# Altium PCB PCB_Emergencia_NoRute.PcbDoc
Units mil, origin at the board's own origin, x right, y up, seen from the top; angles counter-clockwise.
Board outline 2520 x 2760 mil, 2 copper layers (Top Layer, Bottom Layer); 72 components, 52 nets, 238 pads, 0 vias.
Unrouted connection lines stored in the file: 88.
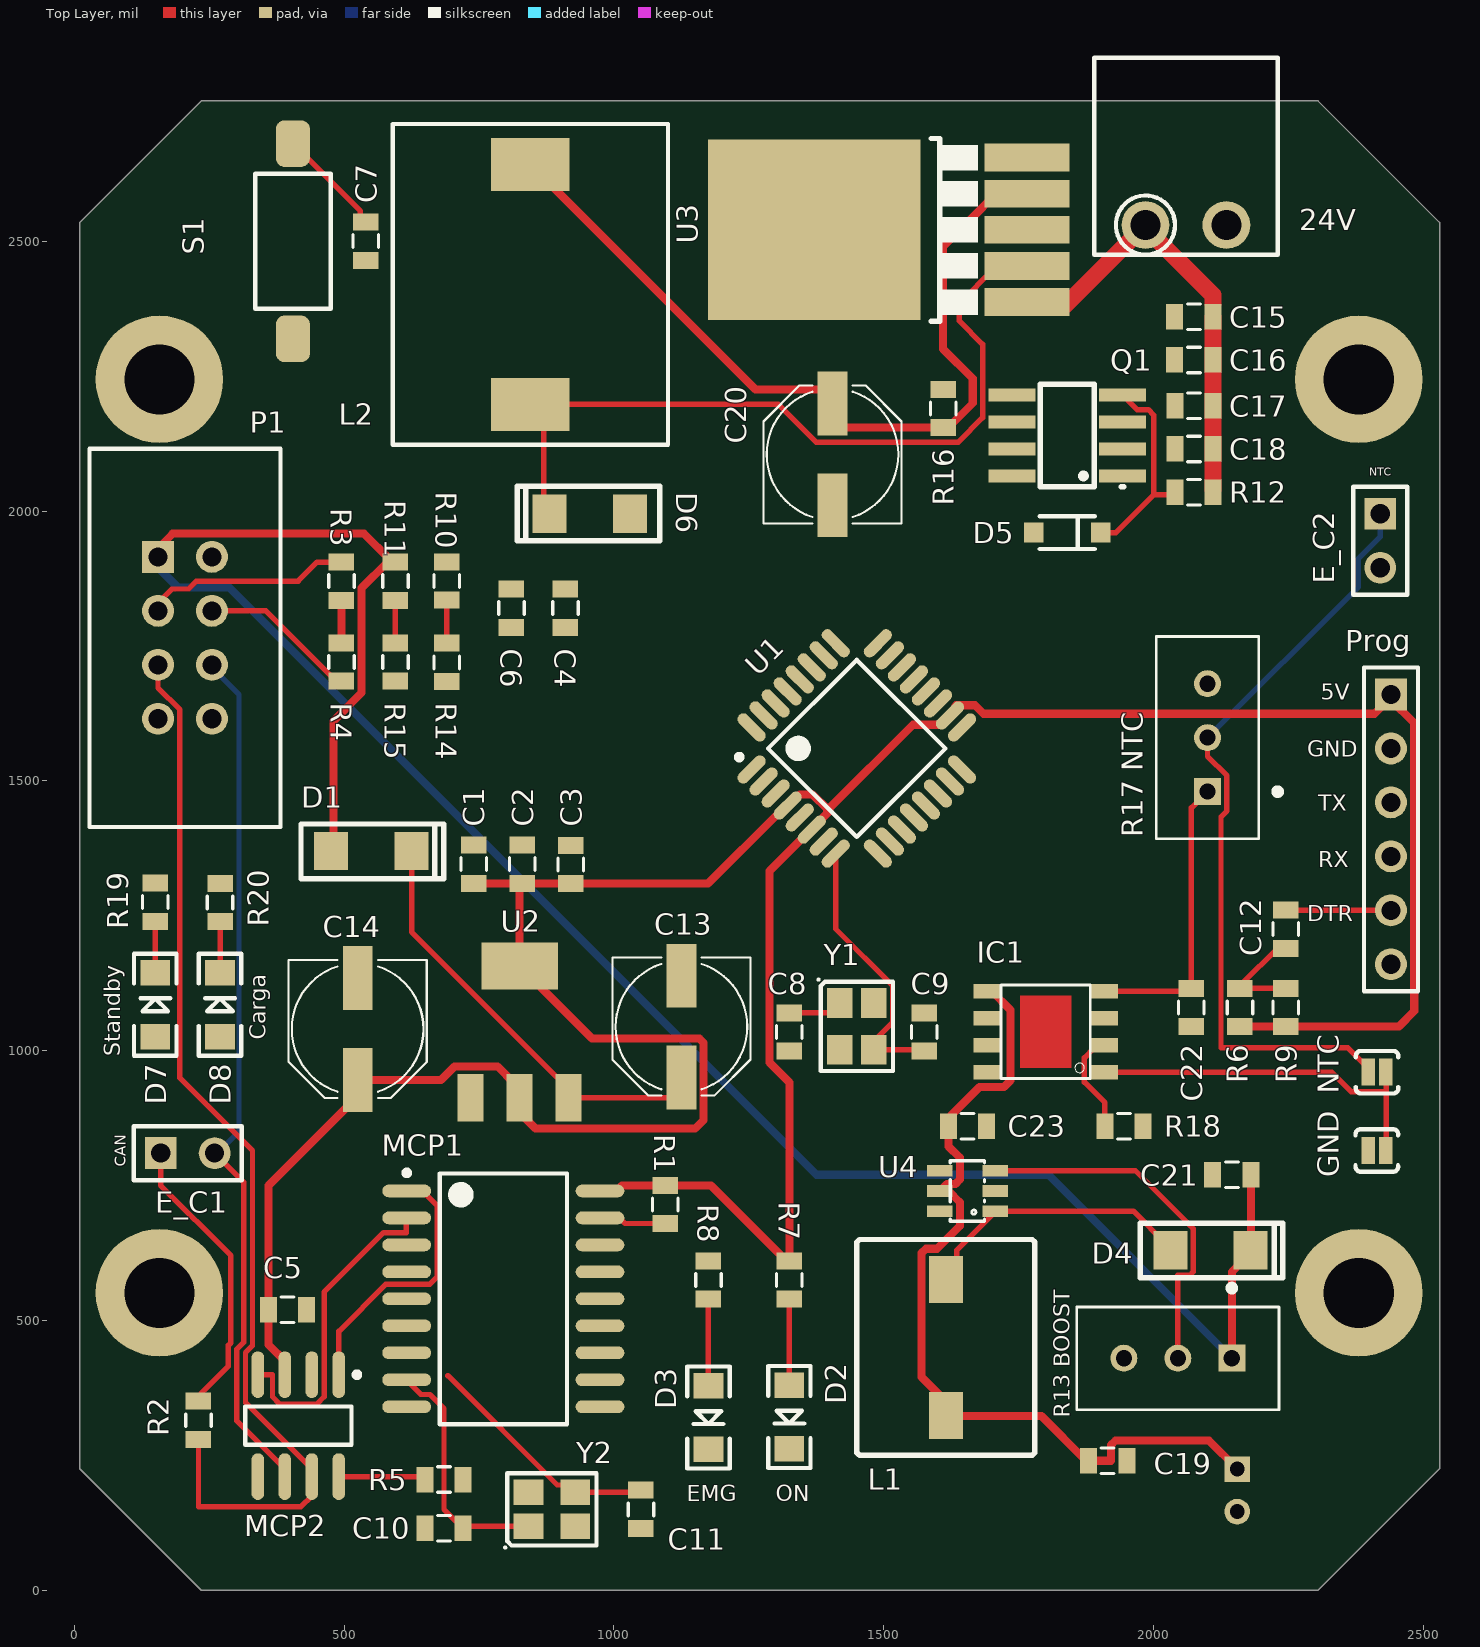
[diagram p0: Top Layer view]
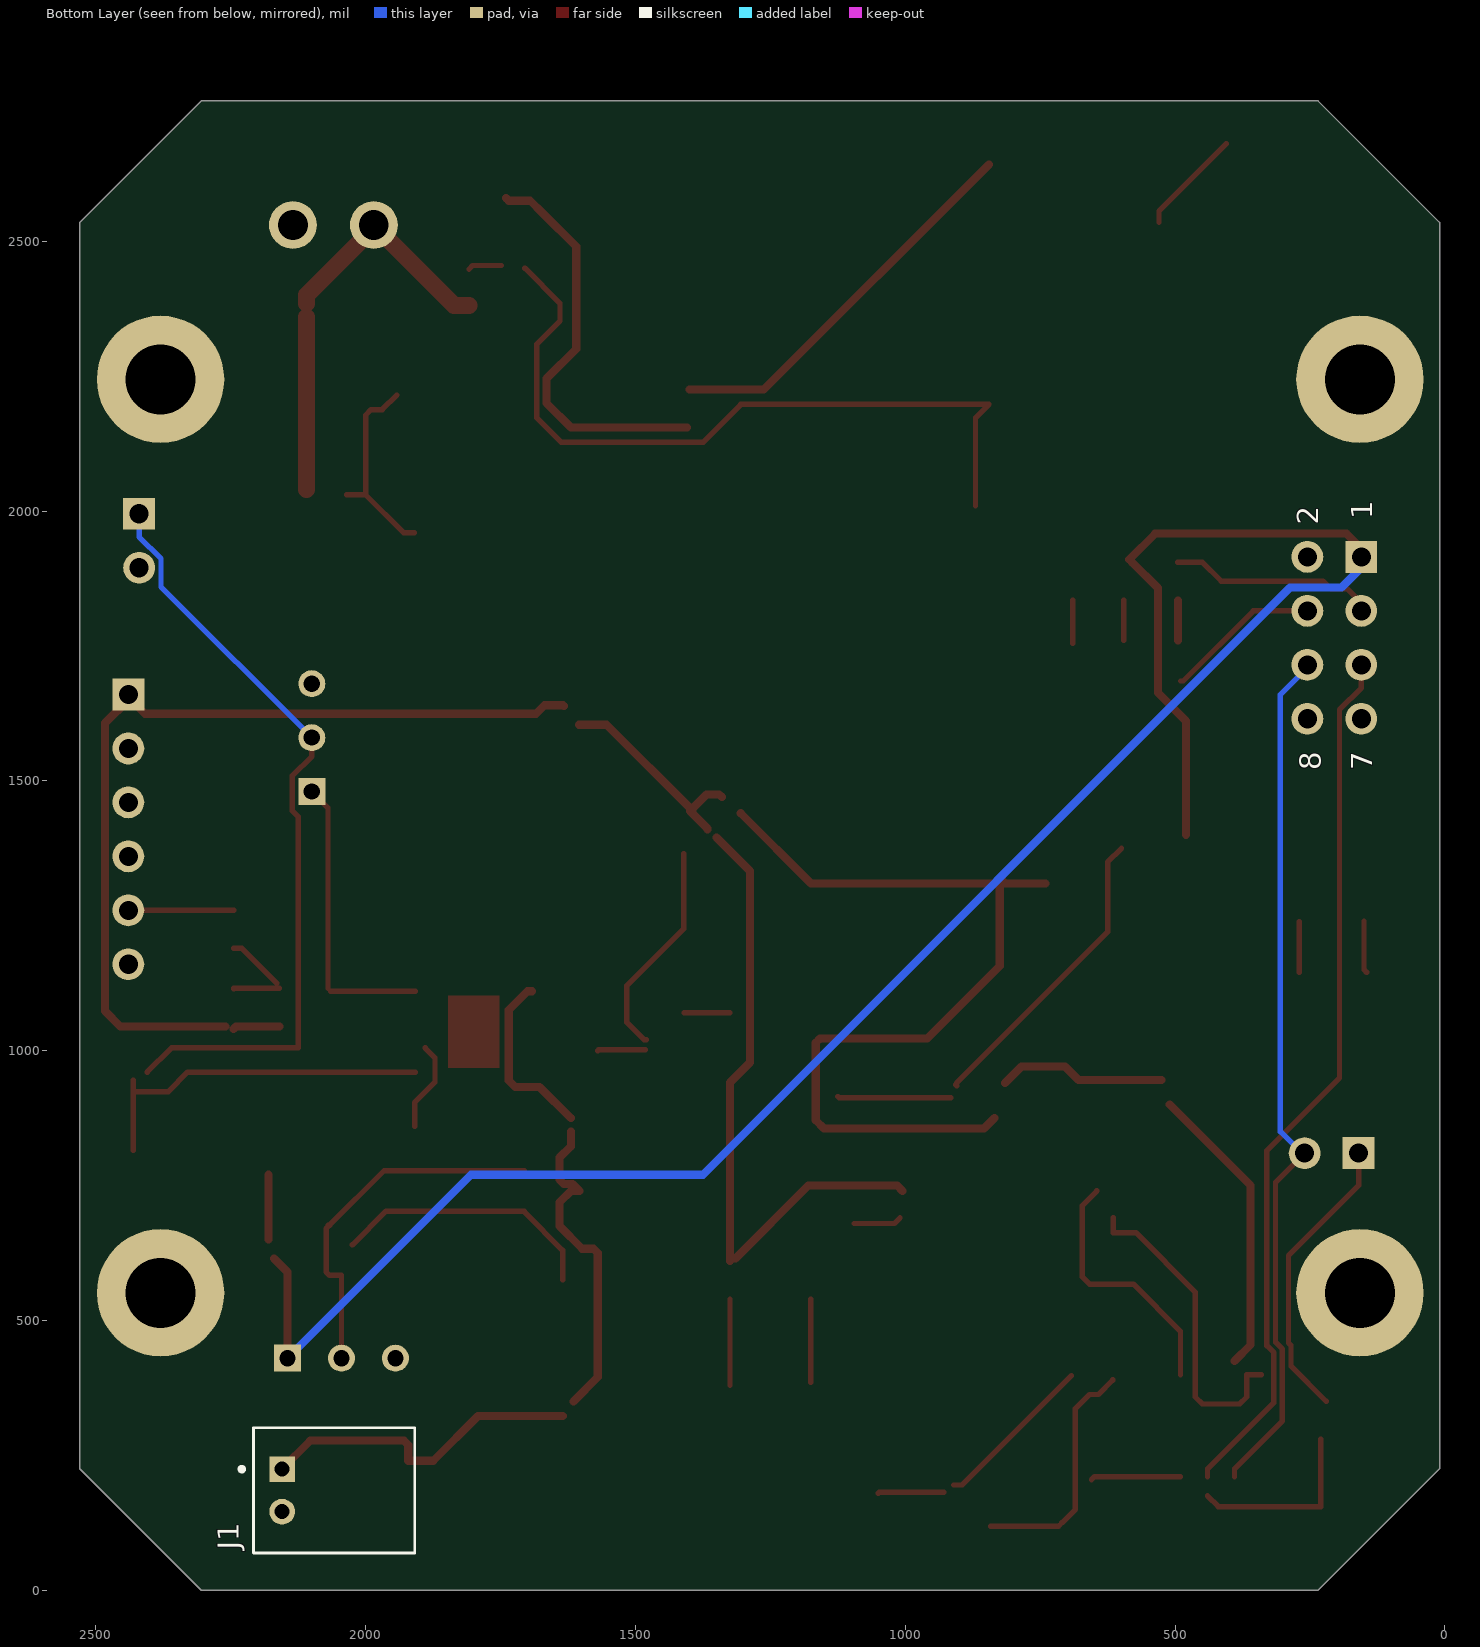
[diagram p1: Bottom Layer view, seen from below]

## Layer stack, top to bottom
Top Solder: solder mask 0.4, Solder Resist, Dk 3.5
Top Layer: signal copper 1.4
Dielectric 1: dielectric 12.6, FR-4, Dk 4.8
Bottom Layer: signal copper 1.4
Bottom Solder: solder mask 0.4, Solder Resist, Dk 3.5

## Board outline
10,225 235,0 2305,0 2530,225 2530,2535 2305,2760 235,2760 10,2535

## Design rules (kind name [scope] priority, off if disabled: settings)
BoardOutlineClearance [All] p1: gap=39.37 ignorepadtopadclearanceinfootprint=FALSE
Clearance Clearance_2 [InNamedPolygon('GND TOP PLANE')] p1: gap=10 ignorepadtopadclearanceinfootprint=FALSE except(0: Arc-Hole Track-Hole SMDPad-Hole THPad-Hole Via-Hole Fill-Hole Poly-Hole Region-Hole Text-Hole)
Clearance Clearance_1 [InNamedPolygon('GND BOTTOM PLANE')] p2: gap=10 ignorepadtopadclearanceinfootprint=FALSE except(0: Arc-Hole Track-Hole SMDPad-Hole THPad-Hole Via-Hole Fill-Hole Poly-Hole Region-Hole Text-Hole)
Clearance Clearance_POWER [InNet('24V') vs InNet('GND')] p3: gap=15 ignorepadtopadclearanceinfootprint=FALSE
Clearance [All] p4: gap=5.98 ignorepadtopadclearanceinfootprint=FALSE
HoleSize [All] p1: absolutevalues=TRUE maxlimit=248.03 minlimit=11.81 maxpercent=80.000 minpercent=20.000
PlaneClearance [All] p1: clearance=197.48
PlaneConnect [All] p1: planeconnectstyle=Relief reliefexpansion=20 reliefentries=4 reliefconductorwidth=15 reliefairgap=-1.97
PolygonConnect [All] p1: connectstyle=Relief reliefconductorwidth=10 reliefentries=4 polygonreliefangle="90 Angle" airgapwidth=-1.97
RoutingVias RoutingVias_24V [InNet('24V')] p1: holewidth=19.68 width=31.5 viastyle="Through Hole" minholewidth=11.81 minwidth=23.62 maxholewidth=39.37 maxwidth=47.24
RoutingVias RoutingVias_GNDC [InNet('GNDC')] p2: holewidth=19.68 width=31.5 viastyle="Through Hole" minholewidth=11.81 minwidth=23.62 maxholewidth=39.37 maxwidth=47.24
RoutingVias [All] p3: holewidth=11.81 width=23.62 viastyle="Through Hole" minholewidth=11.81 minwidth=23.62 maxholewidth=39.37 maxwidth=47.24
SMDNeckDown [All] p1: percent=120.000
SolderMaskExpansion [All] p1: expansion=4
Width Width_24V [InNet('24V')] p1: maxlimit=35 minlimit=27.56 preferedwidth=31.5
Width Width_GNDC [InNet('GNDC')] p2: maxlimit=35 minlimit=23.62 preferedwidth=31.5
Width Width_GND [InNet('GND')] p3: maxlimit=20 minlimit=10 preferedwidth=15 checkconnectedcopper=TRUE
Width Width_9V [InNet('9V')] p4: maxlimit=20 minlimit=10 preferedwidth=15 checkconnectedcopper=TRUE
Width Width_5V [InNet('5V')] p5: maxlimit=15 minlimit=10 preferedwidth=15 checkconnectedcopper=TRUE
Width Width_3.7V [InNet('BAT')] p6: maxlimit=15 minlimit=10 preferedwidth=15 checkconnectedcopper=TRUE
Width Width_5VBuck [InNet('5VBUCK')] p7: maxlimit=15 minlimit=10 preferedwidth=15 checkconnectedcopper=TRUE
Width [All] p8: maxlimit=20 minlimit=10 preferedwidth=10
27 further rules are at their usual default settings.

## Components (designator, comment, footprint, x,y, rotation, side; value= is the part's Value field where it differs from the comment)
24V "20020110-D021A01LF" "FCI 06-381-2PIN" 2060,2660 r0 top (schematic designator 1)
C1 "CapacitorStandard 0603 ceramic capacitor, and 0.1\" leaded capacitor." 0805 740,1345.43 r270 top
C2 "CapacitorStandard 0603 ceramic capacitor, and 0.1\" leaded capacitor." 0805 830,1345.43 r270 top
C3 "CapacitorStandard 0603 ceramic capacitor, and 0.1\" leaded capacitor." 0805 920,1345 r270 top
C4 "CapacitorStandard 0603 ceramic capacitor, and 0.1\" leaded capacitor." 0805 910,1820 r270 top
C5 "CapacitorStandard 0603 ceramic capacitor, and 0.1\" leaded capacitor." 0805 395,520 r180 top
C6 "CapacitorStandard 0603 ceramic capacitor, and 0.1\" leaded capacitor." 0805 810,1820 r270 top
C7 "CapacitorStandard 0603 ceramic capacitor, and 0.1\" leaded capacitor." 0805 540,2500 r90 top
C8 "CapacitorStandard 0603 ceramic capacitor, and 0.1\" leaded capacitor." 0805 1325,1034.57 r90 top
C9 "CapacitorStandard 0603 ceramic capacitor, and 0.1\" leaded capacitor." 0805 1575,1034.57 r90 top
C10 "CapacitorStandard 0603 ceramic capacitor, and 0.1\" leaded capacitor." 0805 685,115 r0 top
C11 "CapacitorStandard 0603 ceramic capacitor, and 0.1\" leaded capacitor." 0805 1050,150 r270 top
C12 "CapacitorStandard 0603 ceramic capacitor, and 0.1\" leaded capacitor." 0805 2245,1225 r270 top
C13 "47u" PANASONIC_D 1125,1044.49 r270 top
C14 "47u" PANASONIC_D 525,1040 r270 top
C15 "CapacitorStandard 0603 ceramic capacitor, and 0.1\" leaded capacitor." 0805 2074.57,2360 r0 top
C16 "CapacitorStandard 0603 ceramic capacitor, and 0.1\" leaded capacitor." 0805 2074.57,2280 r0 top
C17 "CapacitorStandard 0603 ceramic capacitor, and 0.1\" leaded capacitor." 0805 2075,2195 r0 top
C18 "CapacitorStandard 0603 ceramic capacitor, and 0.1\" leaded capacitor." 0805 2075,2115 r0 top
C19 "CapacitorStandard 0603 ceramic capacitor, and 0.1\" leaded capacitor." 0805 1915,240 r0 top
C20 "4.7u" PANASONIC_D 1405,2105 r90 top
C21 "CapacitorStandard 0603 ceramic capacitor, and 0.1\" leaded capacitor." 0805 2145,770 r180 top
C22 "CapacitorStandard 0603 ceramic capacitor, and 0.1\" leaded capacitor." 0805 2070,1080 r270 top
C23 "CapacitorStandard 0603 ceramic capacitor, and 0.1\" leaded capacitor." 0805 1655,860 r0 top
D1 "SS26FL" SS26FL 550,1370 r180 top
D2 "LED Encendido" LED-1206 1325,320.94 r270 top
D3 "LED Parada" LED-1206 1175,320 r270 top
D4 "SS26FL" SS26FL 2105.5,630 r180 top
D5 "13V Zener MM1Z13" SOD-123 1840,1960 r180 top
D6 "SS26FL" SS26FL 955,1995 r0 top
D7 "LED Standby" LED-1206 150,1085 r90 top
D8 "LED Carga" LED-1206 270,1085 r90 top
E_C1 "Header 2" HDR1X2 160,810 r0 top
E_C2 "Header 2" HDR1X2 2420,1995 r270 top
GND "JUMPER-PAD-2-NC_BY_PASTE" PAD-JUMPER-2-NC_BY_PASTE_YES_SILK 2413.75,815 r0 top (schematic designator JP2)
IC1 "TP4056" *SOP-8 1800,1035 r180 top
J1 "Conector JST" *JST_S2B-PH-K-S(LF)(SN) 2155,185 r90 bottom
L1 "CDRH74" CDRH74 1615,450 r90 top value=22uH
L2 "SMMS1360" "SMMS1360 - duplicate" 845,2420 r90 top value=68uH
MCP1 "MCP2515T-I/SO" SOIC-SO18_N 795,540 r0 top
MCP2 "MCP2551T-I/SN" SOIC-SN8_N 415,305 r270 top
NTC "JUMPER-PAD-2-NC_BY_PASTE" PAD-JUMPER-2-NC_BY_PASTE_YES_SILK 2414.22,960 r180 top (schematic designator JP1)
P1 "IDC2X4" IDC2X4 205,1765 r270 top
Prog "Header 6" HDR1X6 2440,1660 r270 top (schematic designator Prog1)
Q1 "IRF7832TRPBF" SO-08 1840,2140 r90 top
R1 "ResistorBasic schematic elements and footprints for 0603, 1206, and PTH resistors." 0805 1095,715 r270 top
R2 "ResistorBasic schematic elements and footprints for 0603, 1206, and PTH resistors." 0805 230,315 r90 top
R3 "ResistorBasic schematic elements and footprints for 0603, 1206, and PTH resistors." 0805 495,1870 r270 top
R4 "ResistorBasic schematic elements and footprints for 0603, 1206, and PTH resistors." 0805 495,1720 r90 top
R5 "ResistorBasic schematic elements and footprints for 0603, 1206, and PTH resistors." 0805 685,205 r180 top
R6 "ResistorBasic schematic elements and footprints for 0603, 1206, and PTH resistors." 0805 2160,1080 r270 top
R7 "ResistorBasic schematic elements and footprints for 0603, 1206, and PTH resistors." 0805 1325,575 r90 top
R8 "ResistorBasic schematic elements and footprints for 0603, 1206, and PTH resistors." 0805 1175,575 r90 top
R9 "ResistorBasic schematic elements and footprints for 0603, 1206, and PTH resistors." 0805 2245,1080 r90 top
R10 "ResistorBasic schematic elements and footprints for 0603, 1206, and PTH resistors." 0805 690,1870.43 r90 top
R11 "ResistorBasic schematic elements and footprints for 0603, 1206, and PTH resistors." 0805 595,1870 r90 top
R12 "20K" 0805 2075,2035 r0 top
"R13 BOOST" "3296W" 3296W 2045,430 r270 top value=20k (schematic designator R13)
R14 "ResistorBasic schematic elements and footprints for 0603, 1206, and PTH resistors." 0805 690,1719.57 r90 top
R15 "ResistorBasic schematic elements and footprints for 0603, 1206, and PTH resistors." 0805 595,1720 r90 top
R16 "ResistorBasic schematic elements and footprints for 0603, 1206, and PTH resistors." 0805 1610,2190 r270 top
"R17 NTC" "3296W" 3296W 2100,1580 r180 top value=20k (schematic designator R17)
R18 "ResistorBasic schematic elements and footprints for 0603, 1206, and PTH resistors." 0805 1945,860 r180 top
R19 "ResistorBasic schematic elements and footprints for 0603, 1206, and PTH resistors." 0805 150,1275 r270 top
R20 "ResistorBasic schematic elements and footprints for 0603, 1206, and PTH resistors." 0805 270,1274.57 r270 top
S1 "FSMSMTR" "TE FSMSMTR" 405,2500 r0 top
U1 "ATmega328-AU" 32A_N 1450,1560 r45 top
U2 "NCP1117" SOT223 825,1035 r0 top
U3 "LM2596S" LM2596S 1371.3,2521.14 r90 top
U4 "MT3608" *SOT23-6 1655,740 r90 top
Y1 "16MHz" "NDK NX3225SA" 1450,1045 r270 top
Y2 "16MHz" "NDK NX3225SA" 885,150 r0 top

## Footprints (in the part's own frame and the unit in brackets; to place one, negate y for a bottom-side part, rotate by r counter-clockwise, add the part's x,y. Pads: shape width x height; smd on the part's side, far side on the other; paste and mask are expansions set on the pad)
32A_N [mm] "Thin QFP, 32-Leads, Body 7x7mm, Pitch 0.8mm, IPC Medium Density"
  oval 1.65x0.55 smd: 1(-4.2,2.8) 2(-4.2,2) 3(-4.2,1.2) 4(-4.2,0.4) 5(-4.2,-0.4) 6(-4.2,-1.2) 7(-4.2,-2) 8(-4.2,-2.8) 17(4.2,-2.8) 18(4.2,-2) 19(4.2,-1.2) 20(4.2,-0.4) 21(4.2,0.4) 22(4.2,1.2) 23(4.2,2) 24(4.2,2.8)
  oval 0.55x1.65 smd: 9(-2.8,-4.2) 10(-2,-4.2) 11(-1.2,-4.2) 12(-0.4,-4.2) 13(0.4,-4.2) 14(1.2,-4.2) 15(2,-4.2) 16(2.8,-4.2) 25(2.8,4.2) 26(2,4.2) 27(1.2,4.2) 28(0.4,4.2) 29(-0.4,4.2) 30(-1.2,4.2) 31(-2,4.2) 32(-2.8,4.2)
  silkscreen extent -4.32,-2.95 2.95,3.75, body extent -4.52,-4.53 4.5,4.5, height 1.15
0805 [mil]
  rect 31.5x47.24 smd: 1(-35.43,0) 2(35.43,0)
  silkscreen extent -12,-24 12,24, body extent -39,-25 39,25, height 20
3296W [mm]
  rect 1.268x1.268 hole 0.76: 1(0,2.54)
  round 1.268 hole 0.76: 2(0,0) 3(0,-2.54)
  silkscreen extent -3.4,-4.76 2.42,4.76, body extent -2.41,-4.76 2.42,4.77, height 11.55
*JST_S2B-PH-K-S(LF)(SN) [mm]
  rect 1.208x1.208 hole 0.7: 1(1,0)
  round 1.208 hole 0.7: 2(-1,0)
  silkscreen extent -2.95,-6.25 2.95,2, body extent -2.95,-6.2 2.95,1.4, height 4.8
*SOP-8 [mm]
  rect 1.3x0.7 smd: 1(-2.75,1.905) 2(-2.75,0.635) 3(-2.75,-0.635) 4(-2.75,-1.905) 5(2.75,-1.905) 6(2.75,-0.635) 7(2.75,0.635) 8(2.75,1.905)
  Top Layer region: -1.2,1.7 1.2,1.7 1.2,-1.7 -1.2,-1.7
  silkscreen extent -2.1,-2.2 2.1,2.2, body extent -3.11,-2.5 3.11,2.5, height 1.87
*SOT23-6 [mm]
  rect 0.55x1.2 smd: 1(-0.95,-1.3) 2(0,-1.3) 3(0.95,-1.3) 4(0.95,1.3) 5(0,1.3) 6(-0.95,1.3)
  silkscreen extent -1.42,-0.81 1.42,0.81, body extent -1.46,-1.42 1.46,1.42, height 1.1
CDRH74 [mm]
  rect 2.2x1.6 smd: 1(-3.2,0) 2(3.2,0)
  silkscreen extent -5.08,-4.19 5.08,4.19, body extent -3.65,-3.65 3.65,3.65, height 4.49
"FCI 06-381-2PIN" [mm] "FCI Pluggable Terminal Block"
  round 2.25 hole 1.4: 1(-1.905,-3.302) 2(1.905,-3.302)
  silkscreen extent -4.32,-4.7 4.32,4.57, body extent -4.4,-4.7 4.4,4.5, height 7.6
HDR1X2 [mm] "Connector; Header; 2 Position"
  rect 1.5x1.5 hole 0.9: 1(0,0)
  round 1.5 hole 0.9: 2(2.54,0)
  silkscreen extent -1.27,-1.27 3.81,1.27
HDR1X6 [mm] "Connector; Header; 6 Position"
  rect 1.5x1.5 hole 0.9: 1(0,0)
  round 1.5 hole 0.9: 2(2.54,0) 3(5.08,0) 4(7.62,0) 5(10.16,0) 6(12.7,0)
  silkscreen extent -1.27,-1.27 13.97,1.27
IDC2X4 [mm] "IDC Connector 2x4"
  rect 1.5x1.5 hole 0.9: 1(-3.81,-1.27)
  round 1.5 hole 0.9: 2(-3.81,1.27) 3(-1.27,-1.27) 4(-1.27,1.27) 5(1.27,-1.27) 6(1.27,1.27) 7(3.81,-1.27) 8(3.81,1.27)
  silkscreen extent -8.9,-4.5 8.9,4.5, body extent -8.89,-4.45 8.89,4.76, height 9.01
LED-1206 [mil]
  rect 47.24x55.12 smd: A(-59.06,0) C(59.06,0)
  silkscreen extent -94,-39 94,39, body extent -63,-31 63,32, height 44
LM2596S [mm]
  rect 1.31x4 smd: 1(-3.4,-10) 2(-1.7,-10) 3(0,-10) 4(1.7,-10) 5(3.4,-10)
  rect 8.5x10 smd: 6(0,0)
  silkscreen extent -4.3,-7.7 4.3,-5.5, body extent -5.37,-11.74 5.3,4.14, height 4.57
"NDK NX3225SA" [mm] "Crystal, 4-Leads, Body 2.50x3.20mm, Pitch 2.20mm, IPC Medium Density"
  rect 1.4x1.2 smd: 1(-1.1,-0.8) 2(1.1,-0.8) 3(1.1,0.8) 4(-1.1,0.8)
  silkscreen extent -2.25,-1.85 2.1,1.7, body extent -1.61,-1.26 1.61,1.26, height 0.6
PAD-JUMPER-2-NC_BY_PASTE_YES_SILK [mil]
  rect 25x50 smd: 1(-15.78,0) 2(16.25,0)
  silkscreen extent -40,-39 40,39
PANASONIC_D [mm]
  rect 3x1.4 smd: +(2.4,0) -(-2.4,0)
  silkscreen extent -3.25,-3.25 3.25,3.25, body extent -3.5,-3.3 3.5,3.3, height 5.4
"SMMS1360 - duplicate" [mm]
  rect 2.5x3.7 smd: PS1(-5.65,0) PS2(5.65,0)
  silkscreen extent -7.55,-6.48 7.55,6.48, body extent -6.67,-5.71 6.67,5.72, height 7
SO-08 [mil]
  rect 23.62x86.61 smd: 1(-75,-102.36) 2(-25,-102.36) 3(25,-102.36) 4(75,-102.36) 5(75,102.36) 6(25,102.36) 7(-25,102.36) 8(-75,102.36)
  silkscreen extent -95,-105 95,50, body extent -96,-118 96,118, height 69
SOD-123 [mil]
  rect 35.43x37.4 smd: A(62.01,0) C(-62.01,0)
  silkscreen extent -51,-31 51,31, body extent -76,-34 76,33, height 58
SOIC-SN8_N [mm] "SOIC, 8-Leads, Body 4.9x3.8mm, Pitch 1.27mm, IPC Medium Density"
  oval 2.2x0.6 smd: 1(-2.4,1.905) 2(-2.4,0.635) 3(-2.4,-0.635) 4(-2.4,-1.905) 5(2.4,-1.905) 6(2.4,-0.635) 7(2.4,0.635) 8(2.4,1.905)
  silkscreen extent -2.52,-2.5 0.9,2.88, body extent -3,-2.45 3,2.45, height 1.75
SOIC-SO18_N [mm] "SOIC, 18-Leads, Body 11.5x7.5mm, Pitch 1.27mm, IPC Medium Density"
  oval 2.3x0.6 smd: 1(-4.55,5.08) 2(-4.55,3.81) 3(-4.55,2.54) 4(-4.55,1.27) 5(-4.55,0) 6(-4.55,-1.27) 7(-4.55,-2.54) 8(-4.55,-3.81) 9(-4.55,-5.08) 10(4.55,-5.08) 11(4.55,-3.81) 12(4.55,-2.54) 13(4.55,-1.27) 14(4.55,0) 15(4.55,1.27) 16(4.55,2.54) 17(4.55,3.81) 18(4.55,5.08)
  silkscreen extent -4.67,-5.9 3,6.05, body extent -5.15,-5.77 5.15,5.76, height 2.65
SOT223 [mil]
  rect 48x88 smd: 1(-91,-122) 2(0,-122) 3(91,-122)
  rect 141.73x86.61 smd: 4(0,122.01)
  body extent -128,-136 128,136, height 63
SS26FL [mil]
  rect 63x71 smd: A(74.5,0) C(-74.5,0)
  silkscreen extent -134,-50 130,51, body extent -104,-50 104,50, height 39
"TE FSMSMTR" [mm]
  rrect50% 1.6x2.19 smd: 1(0,4.595) 2(0,-4.595)
  silkscreen extent -1.78,-3.17 1.78,3.17, body extent -1.75,-4.98 1.75,4.98, height 4.42

## Part data
24V: "TERM BLOCK HDR 2POS R/A 3.81MM", Colour=Green, Manufacturer=FCI, Supplier Part Number 1=609-3819-ND, TemperatureRange="-40C ~ 115C", Voltage=300V, ComponentLink1Description=Datasheet, ComponentLink1URL=http://portal.fciconnect.com/Comergent//fci/drawing/20020110.pdf, ComponentLink2Description="Digi-Key Listing", ComponentLink2URL=http://www.digikey.ca/product-detail/en/20020110-D021A01LF/609-3819-ND/2261255, Number Of Levels=1, Number Of Positions=2, Orientation="90, Right Angle", PartId=7785, Part Number=20020110-D021A01LF, Pitch="0.150\" (3.81mm)", Positions Per Level=2, Price=0,75, Supplier 1=Digi-Key, Type="Through Hole"
C1 C2 C3 C4 C5 C6 C7 C8 C9 C10 C11 C12 C15 C16 C17 C18 C19 C21 C22 C23: library part CAP0805
  C1 C2 C3 C4 C5 C6 C12: Cap=100n
  C7 C8 C9 C10 C11: Cap=22p
  C15 C16 C17 C18 C22 C23: Cap=10u
  C19 C21: Cap=22u
C13 C14 C20: library part 47UF-50V-20%(ELECT), PROD_ID=CAP-10547
D2 D3 D7 D8: library part LED1206
D5: library part DIODE-ZENER16V, PROD_ID=DIO-12440
E_C1 E_C2: "Header, 2-Pin", LatestRevisionDate=17-Jul-2002, LatestRevisionNote="Re-released for DXP Platform.", Publisher="Altium Limited"
IC1: Package="Package Analog Devices", Availability=Unavailable, MF="NanJing Top Power ASIC Corp.", MP=TP4056, Price=None, SnapEDA_Link=https://www.snapeda.com/parts/TP4056%20/NanJing%20Top%20Power%20ASIC%20Corp./view-part/?ref=snap
J1: library part S2B-PH-K-S(LF)(SN), "PH Series 2 Position 2.0 mm Through Hole Side Entry Shrouded Header", Package=None, Availability=Unavailable, MF="JST Sales", MP=S2B-PH-K-S_LF__SN_, Price=None, SnapEDA_Link=https://www.snapeda.com/parts/S2B-PH-K-S%28LF%29%28SN%29/JST%20Sales%20America%20Inc./view-part/?ref=snap
L2: library part INDUCTOR
MCP1: "Stand-Alone CAN Controller With SPI Interface, 18-Pin SOIC, Industrial Temperature, Tape and Reel", Supplier Part Number 1=MCP2515T-I/SO-ND, Code_JEDEC=MS-013, ComponentLink1Description=Datasheet, ComponentLink1URL=http://ww1.microchip.com/downloads/en/DeviceDoc/21801e.pdf, ComponentLink2Description="Packaging Specification", ComponentLink2URL=http://www.microchip.com/stellent/groups/techpub_sg/documents/packagingspec/en012702.pdf, ComponentLink3Description="Microchip.com Home", ComponentLink3URL=http://www.microchip.com/, DatasheetVersion="revE, Nov-2007", PackageDescription="18-Lead Plastic Small Outline (SO) - Wide 7.50mm Body [SOIC]", PackageReference=SOIC-SO18, PackageVersion="revBB, Aug-2009", Published=29-Jan-2009, Publisher="Altium Limited", Supplier 1=Digi-Key, Supplier 2=Farnell, Supplier Part Number 2=1815922
MCP2: "High-Speed CAN Transceiver, 8-Pin SOIC, Industrial Temperature, Tape and Reel", Supplier Part Number 1=MCP2551T-I/SNTR-ND, Code_IPC=SOIC127P600-8, Code_JEDEC=MS-012, ComponentLink1Description=Datasheet, ComponentLink1URL=http://ww1.microchip.com/downloads/en/DeviceDoc/21667E.pdf, ComponentLink2Description="Packaging Specification", ComponentLink2URL=http://www.microchip.com/stellent/groups/techpub_sg/documents/packagingspec/en012702.pdf, ComponentLink3Description="Microchip.com Home", ComponentLink3URL=http://www.microchip.com/, DatasheetVersion="revE, Jan-2007", PackageDescription="8-Lead Plastic Small Outline (SN) - Narrow, 3.90mm Body [SOIC]", PackageReference=SOIC-SN8, PackageVersion="revBB, Aug-2009", Published=29-Jan-2009, Publisher="Altium Limited", Supplier 1=Digi-Key, Supplier 2=Farnell, Supplier Part Number 2=1788569
P1: "Header, 4-Pin, Dual row", LatestRevisionDate=17-Jul-2002, LatestRevisionNote="Re-released for DXP Platform.", Publisher="Altium Limited"
Prog: "Header, 6-Pin", LatestRevisionDate=17-Jul-2002, LatestRevisionNote="Re-released for DXP Platform.", Publisher="Altium Limited"
Q1: library part N-MOSFET-SO8S
R1 R2 R3 R4 R5 R6 R7 R8 R9 R10 R11 R12 R14 R15 R16 R18 R19 R20: library part RESISTOR0805-RES
  R1 R6 R9 R14 R15: Res=10K
  R2: Res=124
  R3 R4: Res=0
  R5: Res=4.7K
  R7 R8 R19 R20: Res=560
  R10: Res=47K
  R11: Res=10k
  R16: Res=0.4
  R18: Res=1.2K
S1: "SWITCH TACTILE SPST-NO 0.05A 24V", Contact Rating @ Voltage="0.05A @ 24VDC", Illumination Type, Colour=-, Manufacturer="TE Connectivity Alcoswitch Switches", Operating Force=180gf, Operating Temperature="-35C ~ 85C", Supplier Part Number 1=450-1758-2-ND, Actuator Orientation="Top Actuated", Actuator Type=Standard, Circuit=SPST-NO, ComponentLink1Description=Datasheet, ComponentLink1URL=http://www.te.com/commerce/DocumentDelivery/DDEController?Action=srchrtrv&DocNm=1437566-3&DocType=Customer+Drawing&DocLang=English, ComponentLink2Description="Digi-Key Listing", ComponentLink2URL=http://www.digikey.com/product-detail/en/FSMSMTR/450-1758-2-ND/529671, Illumination=Non-Illuminated, Illumination Voltage=-, Mechanical Life="20,000 Cycles", PartId=8251, Part Number=FSMSMTR, Price=0,175, Supplier 1=Digi-Key, Switch Function=Off-Mom, Switch Travel=0.25mm
U1: "8-bit AVR Microcontroller, 32KB Flash, 1KB EEPROM, 2KB SRAM, 32-pin TQFP, Industrial Grade (-40°C to 85°C)", Supplier Part Number 1=ATMEGA328-AU-ND, Code_JEDEC=MS-026-ABA, ComponentLink1Description="Manufacturer Link", ComponentLink1URL=http://www.atmel.com/products/avr/default.asp?, ComponentLink2Description="ATmega48A/48PA/88A/88PA/168A/168PA/328/328P Datasheet", ComponentLink2URL=http://www.atmel.com/dyn/resources/prod_documents/8271.pdf, ComponentLink3Description="ATmega48A/48PA/88A/88PA/168A/168PA/328/328P Summary", ComponentLink3URL=http://www.atmel.com/dyn/resources/prod_documents/8271S.pdf, ComponentLink4Description="Atmel.com Home", ComponentLink4URL=http://www.atmel.com, DatasheetVersion="revA, Jan-2010", PackageDescription="32-Lead, 7x7x1.0 mm Body, 0.8mm Lead Pitch, Thin Profile Plastic Quad Flat Package (TQFP)", PackageReference=32A, PackageVersion="revB, Oct-2001", Published=1-Apr-2010, Publisher="Altium Limited", Supplier 1=Digi-Key, Supplier 2=Mouser, Supplier Part Number 2=556-ATMEGA328-AU
U2: library part V_REG_LM1117SOT223, PROD_ID=VREG-08170
U3: "Semiconductors and Actives", Package=None, Availability=Unavailable, MF="Texas Instruments", MP=LM2596S, Price=None, SnapEDA_Link=https://www.snapeda.com/parts/LM2596S/Texas%20Instruments/view-part/?ref=snap
U4: "High Efficiency 1.2MHz / 2A Step Up Converter", Package="Package Analog Devices", Availability=Unavailable, MF="Aerosemi Technology Co., Ltd", MP=MT3608, Price=None, SnapEDA_Link=https://www.snapeda.com/parts/MT3608/Aerosemi%20Technology%20Co.%2C%20Ltd/view-part/?ref=snap
Y1 Y2: library part NX3225SA-16.000MHZ-STD-CSR-1, "CRYSTAL 16.0000MHZ 8PF SMD", Device Package="4-SMD, No Lead (DFN, LCC)", Frequency Stability=15ppm, Load Capacitance=8pF, Manufacturer=NDK, Operating Mode=Fundamental, Supplier Part Number 1=644-1049-2-ND, ComponentLink1Description=Datasheet, ComponentLink1URL=http://media.digikey.com/pdf/Data%20Sheets/NDK%20PDFs/NX3225SA.pdf, ComponentLink2Description="Digi-Key Listing", ComponentLink2URL=http://www.digikey.com/product-detail/en/NX3225SA-16.000MHZ-STD-CSR-1/644-1049-2-ND/1128831, ESR="80 Ohm", Frequency=16MHz, Frequency Tolerance=15ppm, PartId=8509, Part Number=NX3225SA-16.000MHZ-STD-CSR-1, Price=0,3799, Supplier 1=Digi-Key, Type="MHz Crystal"
D1 D4 D6: PROD_ID=SS26FL

## Free pads (board coordinates)
  round 236.22 hole 129.92: 1(157.48,2244.09) 2(2380.32,2244.09) 3(157.48,551.18) 4(2380.32,551.18)

## Nets (pads, with @x,y where several pads share a name; then routed paths per layer and width w, separated by ;. In a path a pad name is that pad's centre, name@x,y a point inside that pad or via, vN(x,y) a via of type N, cw(c..) or ccw(c..) an arc to the next point about the centre after c; other vN are vias at no path point)
5V: C1.2 C2.2 C3.2 C5.2 C6.2 C14.+ MCP1.18 MCP2.3 Prog.1 R1.1 R3.2 R4.2 R6.2 R7.2 R9.1 U1.4 U1.6 U1.18 U2.2 U2.4 | length 5957.2
  Top Layer w15: MCP2.3@390,425 360,455 360,750 C14.+@510,900 ; R4.2@495,1760 R3.2 ; C14.+ 679.44,945.51 704.41,970.48 784.52,970.48 U2.2@815,940 ; C1.2 C2.2@825,1310 ; C2.2@820,1315 C2.2@825,1310 ; U2.2@835,875 854.48,855.52 1150.52,855.52 1166.04,871.04 1166.04,1014.64 1158.15,1022.54 959.47,1022.54 U2.4 C2.2@825,1310 ; C3.2 1174.57,1309.57 U1.4@1305,1440 ; C3.2@925,1310 C2.2 C2.2@825,1310 ; MCP1.18@1005,740 1015,750 1180,750 R7.2@1315,615 ; R7.2 1325,940.7 1287.9,977.8 1287.9,1332.9 U1.6@1350,1395 ; U1.4@1340,1470 1345,1475 1368.19,1475 1396.59,1446.59 ; U1.6 1366.48,1411.48 1399.09,1444.09 1396.59,1446.59 ; 1395,1445 1396.59,1446.59 ; U1.18@1605,1603.9 1553.9,1603.9 1396.59,1446.59 ; U1.18@1632.76,1638.6 1634.16,1640 1668.85,1640 1684.49,1624.36 2409.36,1624.36 Prog.1@2440,1655 ; R6.2 2240.43,1044.57 R9.1@2245,1040 ; R9.1@2260,1045 2455,1045 2483.13,1073.13 2483.13,1606.87 2440,1650 Prog.1@2440,1655 ; Prog.1 Prog.1@2440,1655
5VBUCK: C20.+ L2.PS2 R16.2 U3.4 | length 1486.9
  Top Layer w15: L2.PS2 1262.44,2225 C20.+@1400,2225 ; C20.+@1405,2155 1405.43,2154.57 R16.2 1619.57,2154.57 1664.87,2199.87 1664.87,2245.45 1610,2300.32 1610,2490 1672.51,2552.51 1672.78,2552.51 1695.26,2575 1735,2575 U3.4@1740,2580
9V: "R13 BOOST.1" C21.1 D1.A D4.C P1.1 R11.2 | length 3968.5
  Top Layer w15: P1.1@139.17,1915 182.18,1958.01 536.99,1958.01 R11.2@585,1910 ; D1.A@480,1400 480,1611.13 532.1,1663.23 532.1,1857.1 R11.2@580,1905 ; 2145,430 2145,590 D4.C@2170,615 ; D4.C@2180,650 2180.43,650.43 C21.1
  Bottom Layer w15: P1.1@140,1915 140,1910 191.99,1858.01 286.99,1858.01 1375,770 1805,770 2145,430
24V: 24V.1 C15.2 C16.2 C17.2 C18.2 R10.2 R12.2 U3.1 | length 769.7
  Top Layer w31.5: U3.1@1808.7,2381.14 1836.14,2381.14 24V.1@1982.5,2527.5 ; 24V.1@1962.5,2527.5 24V.1@1982.5,2527.5 ; R12.2@2110,2040 C16.2 C15.2 ; 2110,2385 2110,2400 24V.1@1982.5,2527.5
AREF: C4.2 U1.20
BAT: C19.1 C23.1 IC1.5 J1.1 L1.1 U1.26 U4.5 | length 1554.4
  Top Layer w15: L1.1@1615,350 1570.02,394.98 1570.02,624.88 1577.92,632.78 1598.9,632.78 1640.92,674.8 1640.92,719.01 1619.93,740 U4.5 1616.91,753.09 1633.03,753.09 1640.92,760.99 1640.92,801.71 1620,822.64 C23.1@1620,850 ; C23.1@1620,875 1677.74,932.74 1722.91,932.74 1735,944.83 1735,1075.17 1700.17,1110 IC1.5 ; L1.1@1635,323.03 1791.97,323.03 C19.1@1875,240 ; C19.1 1921.2,240 1921.2,269.21 1929.09,277.1 2102.9,277.1 J1.1@2155,225
C_CS: MCP1.16 U1.14
CANH: MCP2.7 P1.5 R2.1 | length 1991.5
  Top Layer w10: P1.5@135,1700 P1.5@135,1715 ; P1.5 155,1672.29 195.51,1631.78 195.51,949.49 330,815 330,453.22 317.2,440.43 317.2,347.8 440,225 MCP2.7 MCP2.7@440,210 ; R2.1 230,155 420,155 MCP2.7@440,175
CANL: E_C1.2 MCP2.6 P1.6 | length 1609.1
  Top Layer w10: E_C1.2@265,805 314.02,755.98 314.02,459.84 301.22,447.05 301.22,313.78 390,225 MCP2.6
  Bottom Layer w10: P1.6@240,1710 255,1710 305,1660 305,850 E_C1.2@265,810
CTAL1: C10.2 MCP1.8 Y2.1 | length 441
  Top Layer w10: MCP1.8 615.87,389.13 642.2,362.8 658.77,362.8 685,336.57 685,150 C10.2@710,125 ; C10.2@715,120 716.5,118.5 Y2.1
CTAL2: C11.1 MCP1.7 Y2.3 | length 424.2
  Top Layer w10: 692.11,397.8 894.9,195 Y2.3@910,195 ; Y2.3 1048.5,181.5 C11.1@1050,180
EMG_9: R11.1 R15.2 U1.25 | length 74.6
  Top Layer w10: R15.2@595,1760 R11.1
EMG_24: R10.1 R14.2 U1.24 | length 80
  Top Layer w10: R14.2 R10.1
EN_BOOST: U1.1 U4.4
EN_BUCK: U1.2 U3.5
EN_CARGA: D8.A IC1.8 U1.32
GND: "R13 BOOST.3" "R17 NTC.3" C1.1 C2.1 C3.1 C4.1 C5.1 C6.1 C7.1 C8.1 C9.2 C10.1 C11.2 C13.- C14.- C15.1 C16.1 C17.1 C18.1 C19.2 C20.- C21.2 C22.2 C23.2 D2.C D3.C D5.A D6.A E_C2.2 GND.1 IC1.3 J1.2 MCP1.9 MCP2.2 P1.2 Prog.2 Q1.1 Q1.2 Q1.3 R5.1 R14.1 R15.1 R18.1 S1.2 U1.3 U1.5 U1.21 U2.1 U3.3 U3.6 U4.2 Y1.2 Y1.4 Y2.2 Y2.4
GNDC: 24V.2 Q1.5 Q1.6 Q1.7 Q1.8
INT: MCP1.12 U1.13
LED1: R8.2 U1.12
MISO: MCP1.15 U1.16
MOSI: MCP1.14 U1.15
NetC12_1: C12.1 Prog.5 | length 215.2
  Top Layer w10: C12.1 2459.57,1260.43 Prog.5@2460,1260
NetC13_+: C13.+ D1.C U2.3 | length 774
  Top Layer w10: D1.C@599.5,1375 625,1349.5 625,1220 U2.3@905,940 ; U2.3@905,935 U2.3@906.85,936.85 ; U2.3 1123,913 C13.+@1125,915
NetC22_1: "R17 NTC.1" C22.1 D7.A IC1.4 R16.1 | length 533.7
  Top Layer w10: IC1.4 C22.1@2065,1110 ; C22.1 2070,1450 2100,1480
NetD2_A: D2.A R7.1 | length 159.6
  Top Layer w10: D2.A R7.1
NetD3_A: D3.A R8.1 | length 154.6
  Top Layer w10: D3.A@1175,385 R8.1
NetD4_A: D4.A L1.2 U4.1 | length 498.7
  Top Layer w10: L1.2@1635,575 1635,630 U4.1@1705,700 ; U4.1 1962.4,702.6 D4.A@2025,640
NetD5_C: D5.C Q1.4 R12.1 | length 375
  Top Layer w10: D5.C@1910,1960 1930,1960 2000,2030 ; Q1.4 1969.57,2187.79 1990.21,2187.79 2000,2178.01 2000,2030 ; R12.1@2035,2030 2000,2030
NetD6_C: D6.C L2.PS1 U3.2 | length 1468.7
  Top Layer w10: D6.C@870,2010 870,2172.56 L2.PS1 1304.78,2197.56 1374.51,2127.84 1638.17,2127.84 1683.35,2173.02 1683.35,2309.04 1640,2352.39 1640,2385 U3.2@1705,2450 ; U3.2@1748.64,2455 1801.77,2455 U3.2@1808.7,2448.07
NetD7_C: D7.C R19.2 | length 96.6
  Top Layer w10: D7.C@145,1145 150,1150 R19.2
NetD8_C: D8.C R20.2 | length 94.1
  Top Layer w10: D8.C@270,1145 R20.2
NetE_C1_1: E_C1.1 R2.2 | length 542.8
  Top Layer w10: E_C1.1 160,750 290,620 290,458.43 285.24,453.67 285.24,415.24 R2.2@220,350
NetE_C2_1: "R17 NTC.2" E_C2.1 NTC.2 | length 1440.6
  Top Layer w10: 2100,1580 2100,1545.46 2135.95,1509.51 2135.95,1444.05 2125,1433.11 2125,1005 2360,1005 NTC.2@2405,960
  Bottom Layer w10: 2100,1580 2379.49,1859.49 2379.49,1911.78 2420,1952.29 E_C2.1
NetIC1_1: GND.2 IC1.1 NTC.1 | length 667.9
  Top Layer w10: IC1.1 2330,960 2365.98,924.02 2431.25,924.02 ; GND.2@2431.25,815 2431.25,924.02 ; NTC.1@2431.25,945 2431.25,924.02
NetIC1_2: IC1.2 R18.2 | length 168.3
  Top Layer w10: IC1.2@1890,1005 1871.69,986.69 1871.69,941.67 1909.57,903.79 R18.2
NetIC1_6: IC1.6 R19.1
NetIC1_7: IC1.7 R20.1
NetMCP1_1: MCP1.1 MCP2.1 | length 474.9
  Top Layer w10: MCP2.1 490,479.84 577.37,567.2 658.77,567.2 672.13,580.56 672.13,712.87 MCP1.1@645,740
NetMCP1_2: MCP1.2 MCP2.4 | length 593.9
  Top Layer w10: MCP2.4 367.2,399.49 367.2,358.55 380.56,345.2 449.44,345.2 462.8,358.55 462.8,552.63 572.96,662.8 615,662.8 MCP1.2@615,690
NetMCP1_17: MCP1.17 R1.2 | length 89.3
  Top Layer w10: MCP1.17@1010,690 1020.43,679.57 R1.2
NetMCP2_8: MCP2.8 R5.2 | length 167.3
  Top Layer w10: MCP2.8 649.49,210.51 R5.2@655,205
NetR13_2: "R13 BOOST.2" U4.3 | length 673
  Top Layer w10: U4.3 1966.13,777.4 2067.05,676.48 ; 2045,436.52 2045,583.52 2067.05,583.52 2073.48,589.95 2073.48,670.05 2067.05,676.48 ; 2070,676.48 2067.05,676.48
RESET: C7.2 C12.2 R6.1 R9.2 S1.1 U1.29 | length 389.6
  Top Layer w10: S1.1 530,2555.91 C7.2@530,2535 ; R6.1 2244.57,1115.43 R9.2@2245,1115 ; R6.1@2165,1125 2229.57,1189.57 C12.2
RXP: Prog.4 U1.31
SCK: MCP1.13 U1.17
SCL: P1.3 R3.1 U1.28 | length 403.2
  Top Layer w10: P1.3@132.5,1807.5 180.51,1855.51 211.58,1855.51 226.07,1870 414.57,1870 450,1905.43 494.57,1905.43 R3.1@495,1905
SDA: P1.4 R4.1 U1.27 | length 303.8
  Top Layer w10: P1.4@240,1815 P1.4 355,1815 485,1685 R4.1@490,1685
SOS: P1.8 U1.23
TXP: Prog.3 U1.30
XTAL1: C8.2 U1.7 Y1.1 | length 85
  Top Layer w10: C8.2 Y1.1@1410,1070
XTAL2: C9.1 U1.8 Y1.3 | length 494.9
  Top Layer w10: U1.8 1411.03,1225.49 1516.1,1120.42 1516.1,1052.55 1483.55,1020 Y1.3@1480,1020 ; Y1.3 1568.31,1001.69 C9.1@1570,1000
pads on no net: MCP1.3 MCP1.4 MCP1.5 MCP1.6 MCP1.10 MCP1.11 MCP2.5 P1.7 Prog.6 U1.9 U1.10 U1.11 U1.19 U1.22 U4.6

## Silkscreen, mask and mechanical layers (free items; w line width, h text height)
Top Overlay:
  text "NTC" at 2400,2065 h15
  text "5V" at 2310,1650 h30
  text "GND" at 2285,1545 h30
  text "TX" at 2305,1445 h30
  text "RX" at 2305,1340 h30
  text "DTR" at 2285,1240 h30
  text "Carga" at 355,1020 h30 r90
  text "Standby" at 85,990 h30 r90
  text "CAN" at 95,785 h20 r90
  text "EMG" at 1135,165 h30
  text "ON" at 1300,165 h30
Mechanical 2:
  the board outline again, w10

## Text inside footprints (layer, text, board x,y; h text height)
P1: Bottom Overlay "1" at 135,1985 h39.37 r270; Bottom Overlay "2" at 235,1975 h39.37 r270; Bottom Overlay "7" at 135,1520 h39.37 r270; Bottom Overlay "8" at 230,1520 h39.37 r270